# EAGLE board Clap operated system (EAGLE 9.6.2)
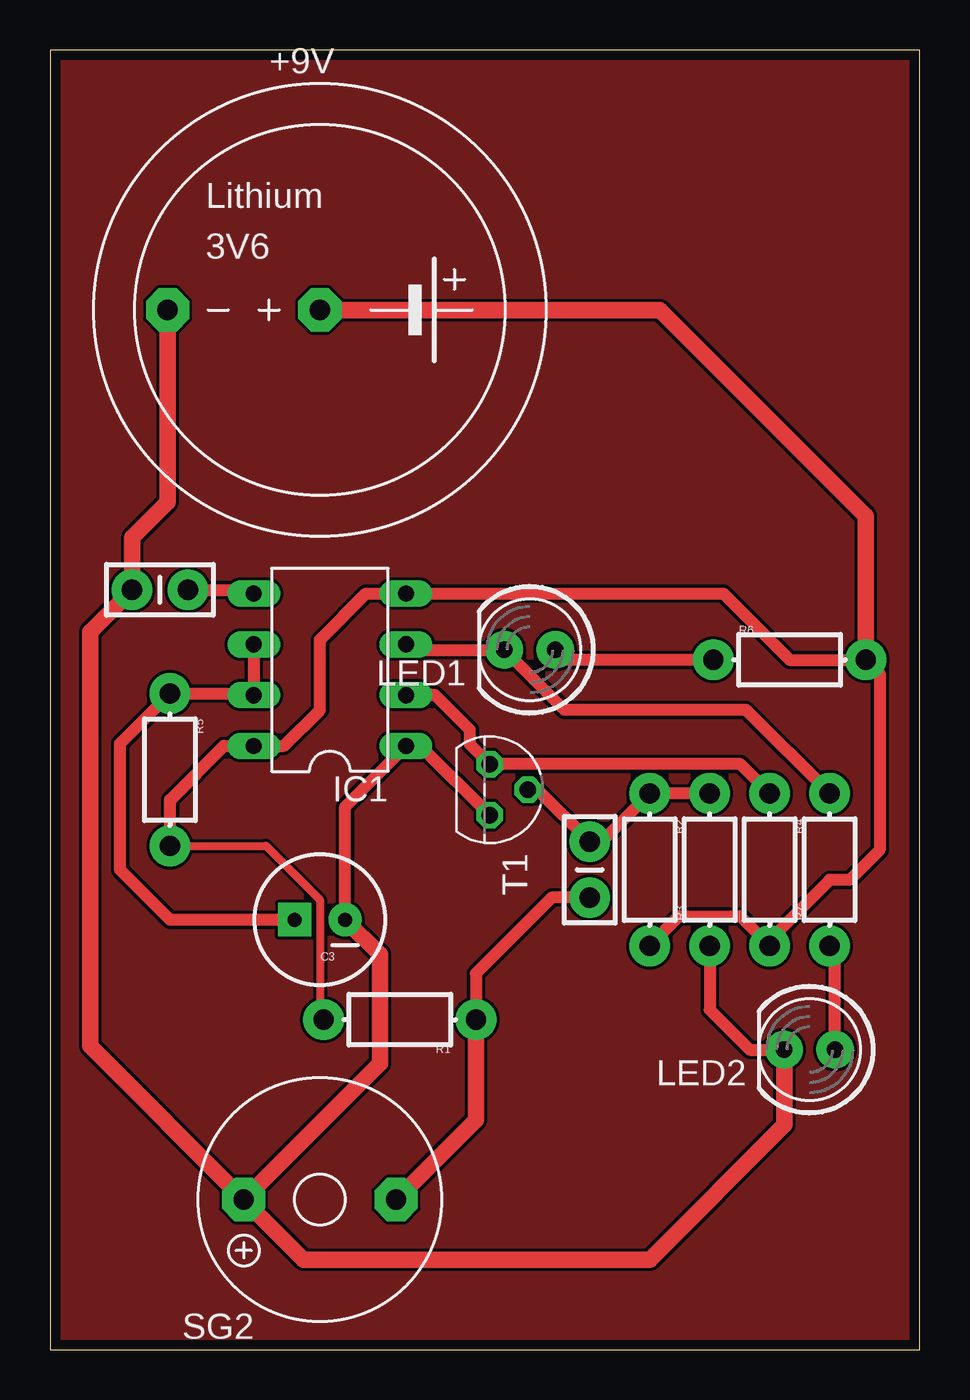
[diagram p0: board, top side]

Size 43.5 x 65 mm. Coordinates in mm from the lower left corner, seen from the top.
Outline: 0,0 43.5,0 43.5,65 0,65 0,0
Copper layers (1*16): Top 0.035mm / dielectric 1.5mm / Bottom 0.035mm
Design rules "default *": minimum track width 6mil, minimum drill 0.35mm, track to track 6mil, track to pad 6mil, pad to pad 6mil, via to via 6mil, smd to smd 6mil, copper to edge 0.5mm, drill to drill 6mil, minimum pad ring 10mil, minimum via ring 8mil, stop-mask expansion 4mil, vias tented up to drill 0mil, thermal gap 10mil

## Footprints (pad centres in the part's own frame; a part is rotated, then mirrored left to right if it is on the bottom)
SL-340/P3.6V = drill 1.016 pad 2.159 octagon: + 0,0; - -7.62,0
CAP-PTH-SMALL-KIT = drill 1.016 pad 2.032: 1 -1.397,0; 2 1.397,0
CPOL-RADIAL-100UF-25V = drill 0.7 pad 1.651 square: 1 1.27,0 | drill 0.7 pad 1.651: 2 -1.27,0
DIL-08 = drill 0.813 long: 1 -3.81,-3.81; 2 -1.27,-3.81; 3 1.27,-3.81; 4 3.81,-3.81; 5 3.81,3.81; 6 1.27,3.81; 7 -1.27,3.81; 8 -3.81,3.81
LED5MM = drill 0.813 pad 1.88: A -1.27,0; K 1.27,0
AXIAL-0.3-KIT = drill 1.016 pad 2.032: P$1 -3.81,0; P$2 3.81,0
F/TMB = drill 1.016 pad 2.159 octagon: + 3.81,0; - -3.81,0
TO92 = drill 0.813 octagon: 1 1.27,0; 2 0,1.905; 3 -1.27,0

## Placement (x,y rotation side)
+9V  SL340P  [SL-340/P3.6V]  13.5,52 0 top
C1  [CAP-PTH-SMALL-KIT]  27,24 90 top
C2  [CAP-PTH-SMALL-KIT]  5.5,38 180 top
C3  [CPOL-RADIAL-100UF-25V]  13.5,21.5 180 top
IC1  NE555P  [DIL-08]  14,34 90 top
LED1  [LED5MM]  24,35 180 top
LED2  [LED5MM]  38,15 180 top
R1  [AXIAL-0.3-KIT]  17.5,16.5 180 top
R2  [AXIAL-0.3-KIT]  30,24 270 top
R3  [AXIAL-0.3-KIT]  33,24 90 top
R4  [AXIAL-0.3-KIT]  36,24 270 top
R5  [AXIAL-0.3-KIT]  6,29 270 top
R6  [AXIAL-0.3-KIT]  37,34.5 0 top
R7  [AXIAL-0.3-KIT]  39,24 90 top
SG2  F/TMB  [F/TMB]  13.5,7.5 180 top
T1  BC547  [TO92]  22,28 270 top

## Library data of the parts
+9V = battery
C1 C2 = SparkFun-Capacitors; PROD_ID: CAP-08370
C3 = SparkFun-Capacitors
IC1 = SparkFun-AnalogIC; MF: Arrow Electronics; MPN: NE555N; OC_FARNELL: 1467742; OC_NEWARK: 89K1486
LED1 LED2 = SparkFun-LED
R1-R7 = SparkFun-Resistors; PROD_ID: RES-08375
SG2 = buzzer; OC_FARNELL: unknown; OC_NEWARK: unknown
T1 = transistor

## Nets
N$1: C1.1 R1.P$1 SG2.-
N$2: C1.2 R2.P$1 R3.P$2 T1.2
N$3: IC1.2 R4.P$1 T1.3
N$4: C3.1 IC1.6 IC1.7 R5.P$1
N$5: C2.1 IC1.5
N$6: IC1.3 LED1.K R7.P$2
N$7: LED2.A R7.P$1
N$8: +9V.+ IC1.4 IC1.8 R1.P$2 R2.P$2 R4.P$2 R5.P$2 R6.P$2
N$9: LED1.A R6.P$1
N$10: +9V.- C2.2 C3.2 IC1.1 LED2.K R3.P$1 SG2.+ T1.1

## Tracks (layer width: path | path; a pad name or v marks a point on that pad's centre or on a via)
GND
  pour Top: 0,0 0,65 43.5,65 43.5,0
N$1
  Top 0.61: C1.1 25.1,22.6 21.31,18.81 R1.P$1
  Top 0.813: SG2.- 21.31,11.5 R1.P$1
N$2
  Top 0.61: R3.P$2 R2.P$1 27.59,25.4 C1.2 24.4,28 T1.2
N$3
  Top 0.61: IC1.2 19.27,32.73 21,31 21,30.27 T1.3 22.01,29.28 34.53,29.28 R4.P$1
N$4
  Top 0.61: IC1.6 IC1.7 10.11,32.81 R5.P$1 3.5,30.31 3.5,24 6,21.5 C3.1
N$5
  Top 0.61: C2.1 10,38 IC1.5
N$6
  Top 0.61: IC1.3 18.08,35 LED1.K 25.73,32 34.81,32 R7.P$2
N$7
  Top 0.61: LED2.A 39.27,19.92 R7.P$1
N$8
  Top 0.406: R5.P$2 10.81,25.19 13.5,22.5 13.5,16.69 R1.P$2
  Top 0.61: R5.P$2 6,27.5 8.69,30.19 IC1.8 11.69,30.19 13.5,32 13.5,35.5 15.81,37.81 IC1.4 33.69,37.81 37,34.5 R6.P$2 41.5,33.81 41.5,25 40,23.5 39,23.5 36,20.5 R4.P$2 34.53,21.66 31.47,21.66 R2.P$2
  Top 0.813: +9V.+ 30.5,52 40.81,41.69 R6.P$2
N$9
  Top 0.61: R6.P$1 25.77,34.5 LED1.A
N$10
  Top 0.61: T1.1 18.54,30.19 IC1.1 14.77,27.15 C3.2 | R3.P$1 33,17 35,15 LED2.K
  Top 0.813: +9V.- 5.88,42.38 4.1,40.6 C2.2 2,35.9 2,15.19 SG2.+ | C3.2 16.5,19.77 16.5,14.31 SG2.+ | SG2.+ 12.69,4.5 30,4.5 36.73,11.23 LED2.K